# Altium PCB Layout_rectangular.pcbdoc
Units mm, origin at the board's own origin, x right, y up, seen from the top; angles counter-clockwise.
Board outline 101 x 79.7 mm, 2 copper layers (Top Layer, Bottom Layer); 20 components, 45 nets, 102 pads, 135 vias.
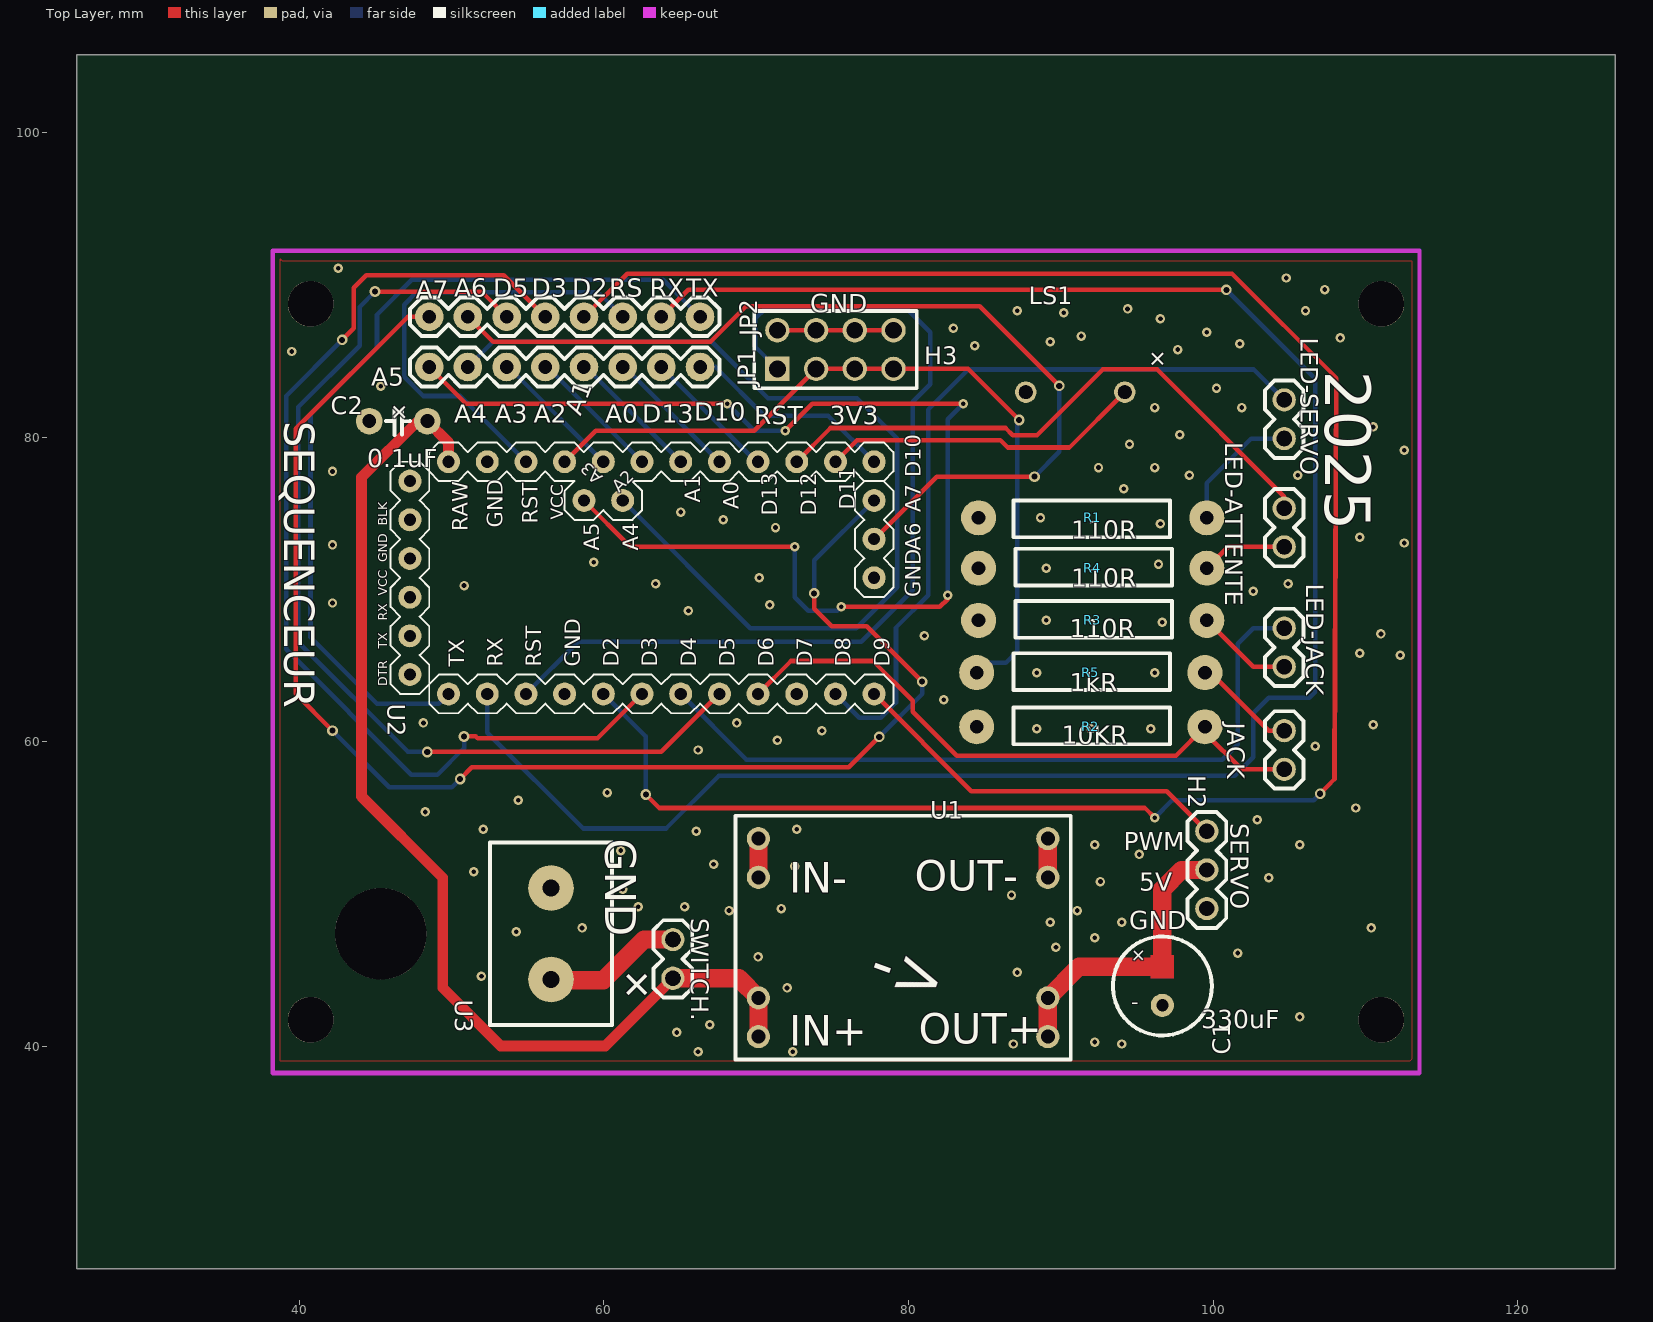
[diagram p0: Top Layer view]
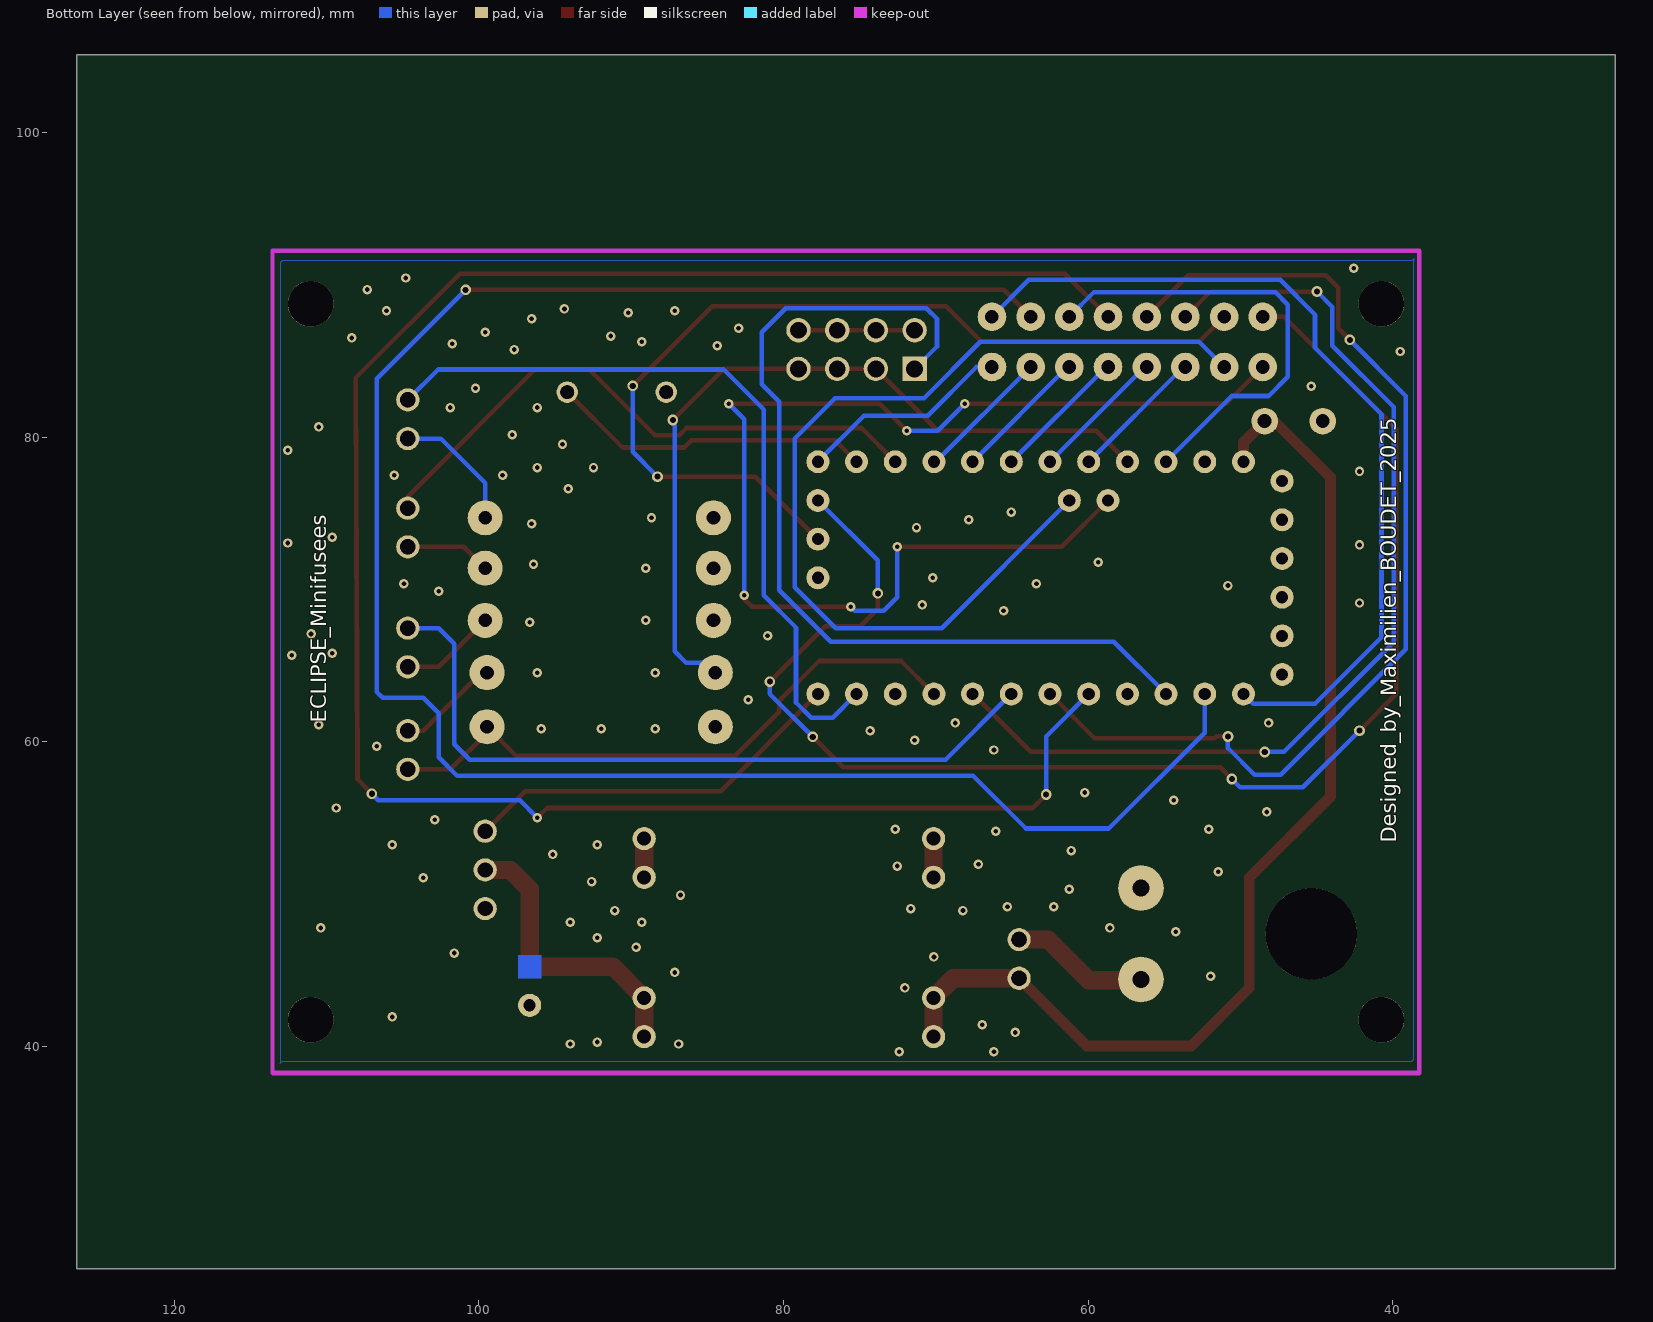
[diagram p1: Bottom Layer view, seen from below]

## Layer stack, top to bottom
Top Layer: signal copper (thickness not stored)
Dielectric: dielectric 0.32, FR-4, Dk 4.8
Bottom Layer: signal copper (thickness not stored)

## Board outline
126.4,25.4 25.4,25.4 25.4,105.1 126.4,105.1

## Components (designator, comment, footprint, x,y, rotation, side; value= is the part's Value field where it differs from the comment)
C1 "330uF" "CAPACITOR, 100UF 2.54MM PIN CAPACITOR" 96.67,43.965 r270 top
C2 "0.1uF" "CERAMIC CAPACITOR 150MIL" 44.6,81.049 r0 top
H2 "PINHEADER1x3RANGA" PINHEADER1X3 99.591,47.775 r270 top
H3 "IPCP254M08PB28V" HDR-TH_8P-P2.54-V-F-R2-C4-S2.54 75.207,85.748 r0 top
JACK "Branchement Jack" PINHEADER1X2 104.671,64.539 r90 top
JP1 "JUMPER-8-PINS" CONNECTOR-8-MALE-FEMALE 57.427,84.605 r0 top
JP2 "JUMPER-8-PINS" CONNECTOR-8-MALE-FEMALE 57.427,87.907 r0 top
LED-ATTENTE "LED1" PINHEADER1X2 104.671,68.984 r270 top
LED-JACK "LED2" PINHEADER1X2 104.671,61.11 r270 top
LED-SERVO "LED3" PINHEADER1X2 104.671,76.096 r270 top
LS1 "BUZZER-PTH_NO_SILK" BUZZER-12MM-NS 90.955,82.954 r0 top
R1 "110R" "1W RESISTANCE" 99.591,74.699 r180 top
R2 "10k" "1W RESISTANCE" 84.478,60.983 r0 top
R3 "110R" "1W RESISTANCE" 84.605,67.968 r0 top
R4 "110R" "1W RESISTANCE" 84.605,71.397 r0 top
R5 "1k" "1W RESISTANCE" 84.478,64.539 r0 top
SWITCH. "KCD1-101A" PINHEADER1X2 64.539,40.663 r270 top
U1 "MP1584EN_Mini_module_BUCK_4.5V-28V" MP1584EN_MINI_MODULE_BUCK_4.5V-28V 79.652,47.14 r0 top
U2 "Arduino Pro-Mini" ARDUINOPROMINI_ARDUINO_PRO_MINI 58.697,66.952 r90 top
U3 "PAD_CONN_BATT_9V" PAD_CONN_AWG19 56.538,47.394 r270 top

## Footprints (in the part's own frame and the unit in brackets; to place one, negate y for a bottom-side part, rotate by r counter-clockwise, add the part's x,y. Pads: shape width x height; smd on the part's side, far side on the other; paste and mask are expansions set on the pad)
"1W RESISTANCE" [mm]
  round 2.3 hole 0.9 paste+0 mask+0.051: 1(0,0) 2(14.986,0)
  silkscreen extent 2.41,-1.14 12.7,1.27
ARDUINOPROMINI_ARDUINO_PRO_MINI [mm]
  round 1.508 hole 0.8 paste+0 mask+0.102: A0(11.43,-8.89) A1(11.43,-6.35) A2(11.43,-3.81) A3(11.43,-1.27) A4(8.89,-2.54) A5(8.89,0) A6(6.35,-19.05) A7(8.89,-19.05) BLK(10.16,11.43) D2(-3.81,-1.27) D3(-3.81,-3.81) D4(-3.81,-6.35) D5(-3.81,-8.89) D6(-3.81,-11.43) D7(-3.81,-13.97) D8(-3.81,-16.51) D9(-3.81,-19.05) D10(11.43,-19.05) D11(11.43,-16.51) D12(11.43,-13.97) D13(11.43,-11.43) DTR(-2.54,11.43) GND(-3.81,1.27) GND@1(11.43,6.35) GND@2(7.62,11.43) GND@3(3.81,-19.05) RAW(11.43,8.89) RST(11.43,3.81) RST@1(-3.81,3.81) RX(-3.81,6.35) RX@1(2.54,11.43) TX(-3.81,8.89) TX@1(0,11.43) VCC(11.43,1.27) VCC@1(5.08,11.43)
  silkscreen extent -5.08,-20.32 12.7,12.7
BUZZER-12MM-NS [mm]
  round 1.408 hole 0.9 slot 0.9 at 0 deg paste+0 mask+0.051: +(3.25,0) -(-3.25,0)
"CAPACITOR, 100UF 2.54MM PIN CAPACITOR" [mm]
  round 1.52 hole 0.8 paste+0 mask+0.051: 2(1.27,0)
  Top Layer region: -2.03,0.76 -0.51,0.76 -0.51,-0.76 -2.03,-0.76
  Bottom Layer region: -2.03,0.76 -0.51,0.76 -0.51,-0.76 -2.03,-0.76
  Multi-Layer region: -2.03,0.76 -0.51,0.76 -0.51,-0.76 -2.03,-0.76
  silkscreen extent -3.25,-3.25 3.25,3.25
"CERAMIC CAPACITOR 150MIL" [mm]
  round 1.75 hole 0.914 paste+0 mask+0.102: 1(0,0) 2(3.81,0)
  silkscreen extent 1.11,-0.91 2.67,0.78
CONNECTOR-8-MALE-FEMALE [mil]
  round 74 hole 35 paste+0 mask+4: 1(-350,0) 2(-250,0) 3(-150,0) 4(-50,0) 5(50,0) 6(150,0) 7(250,0) 8(350,0)
  silkscreen extent -400,-50 400,50
HDR-TH_8P-P2.54-V-F-R2-C4-S2.54 [mm]
  rect 1.6x1.6 hole 1.1 paste+0 mask+0.051: 1(-3.81,-1.27)
  round 1.6 hole 1.1 paste+0 mask+0.051: 2(-3.81,1.27) 3(-1.27,-1.27) 4(-1.27,1.27) 5(1.27,-1.27) 6(1.27,1.27) 7(3.81,-1.27) 8(3.81,1.27)
  silkscreen extent -5.33,-2.54 5.33,2.54
MP1584EN_MINI_MODULE_BUCK_4.5V-28V [mil]
  round 60 hole 36 paste+0 mask+2: 1(-374.01,255.9) 2(-374.01,155.9) 3(-374.01,-155.9) 4(-374.01,-255.9) 5(374.02,255.9) 6(374.02,155.9) 7(374.02,-155.9) 8(374.02,-255.9)
  silkscreen extent -433,-315 433,315
PAD_CONN_AWG19 [mm]
  round 3 hole 1.1 paste+0 mask+0.051: 1(-3,0) 2(3,0)
  silkscreen extent -6,-4 6,4
PINHEADER1X2 [mil]
  round 60 hole 39.37 slot 39.57 at 0 deg paste+0 mask+2: 1(-250,0) 2(-150,0)
  silkscreen extent -300,-50 -100,50
PINHEADER1X3 [mil]
  round 60 hole 39.37 paste+0 mask+2: 1(-250,0) 2(-150,0) 3(-50,0)
  silkscreen extent -300,-50 0,50

## Free pads (board coordinates)
  round 3 hole 3 unplated paste+0: ""(40.75,41.75) ""(40.75,88.75) ""(111.05,41.75) ""(111.05,88.75)
  round 6 hole 6 unplated paste+0: ""(45.362,47.394)

## Via types
v1: diameter 0.62, hole 0.31, Top Layer to Bottom Layer, tented both sides, 120 vias
v2: diameter 0.7, hole 0.4, Top Layer to Bottom Layer, tented both sides, 15 vias

## Nets (pads, with @x,y where several pads share a name; then routed paths per layer and width w, separated by ;. In a path a pad name is that pad's centre, name@x,y a point inside that pad or via, vN(x,y) a via of type N, cw(c..) or ccw(c..) an arc to the next point about the centre after c; other vN are vias at no path point)
3V3: H3.3 H3.5 H3.7 R5.1 U2.VCC | length 53
  Top Layer w0.3: U2.VCC 59.459,80.414 69.873,80.414 H3.3 H3.5 H3.7 83.91,84.478 v2(87.264,81.124)
  Bottom Layer w0.3: R5.1@84.986,65.047 R5.1 85.113,65.174 86.383,65.174 87.145,65.936 87.145,81.123 v2@87.264,81.123
9V: C2.2 SWITCH..2 U1.3 U1.4 U2.RAW | length 72
  Top Layer w0.7: U2.RAW 49.807,79.652 C2.2 47.775,81.049 44.092,77.366 44.092,56.411 49.423,51.08 49.423,43.841 53.236,40.028 60.094,40.028 SWITCH..2
  Top Layer w1.2: SWITCH..2 68.859,44.473 U1.3 U1.4
C1_1: H2.2 U1.7 U1.8 | length 19.4
  Top Layer w1.2: U1.7 91.206,45.235 96.67,45.235 96.67,50.315 97.94,51.585 H2.2 ; U1.8 U1.7
GND: C1.2 C2.1 H2.3 H3.2 H3.4 H3.6 H3.8 LS1.- R1.2 R2.1 R3.1 R4.1 U1.1 U1.2 U1.5 U1.6 U2.GND U2.GND@1 U2.GND@3 U3.1 | length 12.7
  Top Layer w0.3: H3.2 H3.4 H3.6 H3.8
  Top Layer w1.2: U1.2 U1.1 ; U1.6 U1.5
  other v1: 66.19,39.647 72.413,39.647 86.891,40.155 94.003,40.155 92.225,40.282 64.793,40.917 66.952,41.425 105.687,41.933 72.032,43.838 51.966,44.6 87.145,44.854 70.127,45.87 101.623,46.124 89.685,46.505 92.225,47.14 54.252,47.521 58.57,47.775 110.386,47.775 89.304,48.156 94.003,48.156 68.222,48.918 91.082,48.918 71.651,49.045 62.253,49.172 65.301,49.172 86.764,49.934 61.237,50.315 92.606,50.823 103.655,51.077 51.458,51.458 72.54,51.839 67.206,51.966 95.146,52.601 61.11,52.855 92.225,53.236 105.687,53.236 66.063,54.125 52.093,54.252 72.667,54.252 102.893,54.887 48.283,55.395 109.37,55.649 54.379,56.157 60.221,56.665 66.19,59.459 106.703,59.713 71.397,60.094 74.318,60.729 88.415,60.856 91.971,60.856 95.908,60.856 110.513,61.11 48.156,61.237 68.73,61.237 82.319,62.761 88.415,64.539 96.162,64.539 112.291,65.682 109.624,65.809 81.049,66.952 111.021,67.079 96.67,67.841 89.05,67.968 65.555,68.603 70.889,68.984 42.187,69.111 102.639,69.873 50.823,70.254 63.396,70.381 104.925,70.381 70.208,70.762 89.05,71.397 96.416,71.651 59.332,71.778 42.187,72.921 112.545,73.048 109.624,73.429 71.27,74.064 96.543,74.318 67.841,74.572 88.669,74.699 65.047,75.08 94.13,76.604 98.448,77.493 105.56,77.493 42.187,77.747 92.479,78.001 96.162,78.001 112.545,79.144 94.511,79.525 97.813,80.16 110.513,80.668 96.162,81.938 101.877,81.938 100.226,83.208 45.362,83.335 39.52,85.621 97.686,85.748 84.351,86.002 101.75,86.129 89.304,86.256 108.354,86.51 91.336,86.637 99.591,86.891 82.954,87.145 96.543,87.78 90.193,88.161 87.145,88.288 106.068,88.288 94.384,88.415 107.338,89.685 104.798,90.447 42.568,91.082
INTERRUPTEUR_1: SWITCH..1 U3.2 | length 9.1
  Top Layer w1.2: U3.2@56.538,44.346 59.967,44.346 62.634,47.013 SWITCH..1
JACK_2: JACK.2 R5.2 | length 7.3
  Top Layer w0.3: R5.2 R5.2@100.353,64.539 ; R5.2@99.845,64.539 103.655,60.729 JACK.2
LED-ATTENTE_1: LED-ATTENTE.1 U2.D12 | length 39.1
  Top Layer w0.3: U2.D12 74.884,80.599 86.373,80.599 86.85,80.122 88.44,80.122 92.758,84.442 96.325,84.442 104.671,76.096 LED-ATTENTE.1
LED-JACK_1: LED-JACK.1 U2.D4 | length 48.9
  Bottom Layer w0.3: U2.D4 69.365,58.824 100.607,58.824 101.623,59.84 101.623,66.444 102.639,67.46 LED-JACK.1
LED-SERVO_1: LED-SERVO.1 U2.D8 | length 50.4
  Bottom Layer w0.3: U2.D8 76.769,61.58 78.191,61.58 79.182,62.573 79.182,67.498 81.303,69.619 81.303,81.811 83.929,84.437 102.68,84.437 LED-SERVO.1
LS1_+: LS1.+ U2.D11 | length 21.3
  Top Layer w0.3: U2.D11 76.623,79.798 86.04,79.798 86.517,79.32 90.571,79.32 LS1.+
R1_1: LED-SERVO.2 R1.1 | length 9
  Bottom Layer w0.3: R1.1@99.718,75.08 99.591,74.953 R1.1 99.591,76.985 102.512,79.906 LED-SERVO.2
R2_2: JACK.1 R2.2 U2.D6 | length 40.6
  Top Layer w0.3: U2.D6 72.286,65.301 77.67,65.301 80.272,62.699 80.272,61.973 83.161,59.084 97.565,59.084 R2.2 99.464,60.602 101.877,58.189 JACK.1
R3_2: LED-JACK.2 R3.2 | length 6.3
  Top Layer w0.3: R3.2 102.639,64.92 LED-JACK.2
R4_2: LED-ATTENTE.2 R4.2 | length 5.7
  Top Layer w0.3: R4.2 100.988,72.794 LED-ATTENTE.2
S$150: 
S$152: 
S$236: 
S$240: 
S$92912: 
S$92916: 
S$92920: 
U2_A0: JP1.6 U2.A0 | length 8.9
  Bottom Layer w0.3: JP1.6 61.364,84.605 U2.A0
U2_A1: JP1.5 U2.A1 | length 8.9
  Bottom Layer w0.3: JP1.5 58.824,84.605 U2.A1
U2_A2: JP1.4 U2.A2 | length 8.9
  Bottom Layer w0.3: JP1.4 56.284,84.605 U2.A2
U2_A3: JP1.3 U2.A3 | length 8.9
  Bottom Layer w0.3: JP1.3 53.744,84.605 U2.A3
U2_A4: JP1.2 U2.A4 | length 63.9
  Bottom Layer w0.3: JP1.2 52.728,86.256 67.079,86.256 70.78,82.555 76.622,82.555 79.271,79.906 79.271,70.147 76.584,67.46 69.619,67.46 U2.A4
U2_A5: JP1.1 U2.A5 | length 79.9
  Top Layer w0.3: JP1.1 50.95,82.192 v1(68.095,82.192) ; U2.A5 61.745,72.794 v1(72.54,72.794) ; v1(71.905,80.414) 73.683,82.192 v1(83.589,82.192) ; v1(75.588,68.857) 82.065,68.857 82.573,69.365 v1(82.573,69.619)
  Bottom Layer w0.3: v1(68.095,82.192) 69.873,80.414 v1(71.905,80.414) ; v1(72.54,72.794) 72.54,69.873 72.54,69.492 73.429,68.603 75.334,68.603 v1(75.588,68.857) ; v1(82.573,69.619) 82.573,81.176 v1(83.589,82.192)
U2_A6: JP2.2 U2.A6 | length 61.5
  Top Layer w0.3: JP2.2 52.728,86.256 67.002,86.256 69.334,88.588 84.682,88.588 v2(89.903,83.367) ; U2.A6 81.851,77.406 v2(88.274,77.406)
  Bottom Layer w0.3: v2(88.274,77.406) 89.903,79.035 v2(89.903,83.367)
U2_A7: JP2.1 U2.A7 | length 94
  Top Layer w0.3: v2(42.187,60.729) 39.774,63.142 39.774,80.541 47.14,87.907 JP2.1 ; v2(50.569,57.554) 51.331,58.316 76.078,58.316 v2(78.084,60.322) ; v2(73.81,69.746) 73.81,68.73 74.953,67.587 77.257,67.587 v2(80.901,63.943)
  Bottom Layer w0.3: v2(42.187,60.729) 45.901,57.015 50.03,57.015 v2(50.569,57.554) ; v2(73.81,69.746) 73.81,71.905 U2.A7 ; v2(78.084,60.322) 80.901,63.139 v2(80.901,63.943)
U2_BLK: U2.BLK
U2_D2: JP2.5 U2.D2 | length 134.4
  Top Layer w0.3: JP2.5 61.527,90.737 101.242,90.737 108.1,83.879 107.973,57.554 v2(107.03,56.585) ; v2(62.761,56.538) 63.65,55.649 95.527,55.649 v1(96.162,55.014)
  Bottom Layer w0.3: U2.D2 62.761,60.348 v2(62.761,56.538) ; v1(96.162,55.014) 97.305,56.157 106.601,56.157 v2(107.03,56.585)
U2_D3: JP2.4 U2.D3 | length 69.1
  Top Layer w0.3: v2(42.822,86.383) 43.584,87.145 43.584,89.812 44.402,90.63 53.434,90.63 JP2.4 ; v2(50.823,60.348) 51.585,60.348 51.712,60.221 59.586,60.221 U2.D3
  Bottom Layer w0.3: v2(42.822,86.383) 39.139,82.7 39.139,66.068 47.366,57.841 49.078,57.841 50.823,59.586 v2(50.823,60.348)
U2_D5: JP2.3 U2.D5 | length 66.6
  Top Layer w0.3: v2(44.981,89.558) 51.966,89.558 JP2.3 ; v2(48.41,59.332) 63.777,59.332 U2.D5
  Bottom Layer w0.3: v2(44.981,89.558) 43.965,88.542 43.965,86.002 39.942,81.979 39.942,66.53 47.14,59.332 v2(48.41,59.332)
U2_D9: H2.1 U2.D9 | length 25.6
  Top Layer w0.3: U2.D9 84.134,56.755 96.961,56.755 H2.1
U2_D10: JP1.8 U2.D10 | length 14
  Bottom Layer w0.3: JP1.8 67.333,84.605 70.531,81.407 74.722,81.407 U2.D10
U2_D13: JP1.7 U2.D13 | length 8.9
  Bottom Layer w0.3: JP1.7 70,78.382 U2.D13
U2_DTR: U2.DTR
U2_GND@2: U2.GND@2
U2_RST: JP2.6 U2.RST | length 30.4
  Bottom Layer w0.3: U2.RST 50.569,82.7 48.156,82.7 46.899,83.957 46.899,88.697 47.727,89.525 59.619,89.525 JP2.6
U2_RST@1: H3.1 U2.RST@1 | length 62
  Bottom Layer w0.3: 54.887,63.142 58.316,66.571 76.911,66.571 80.287,69.947 80.287,82.319 81.43,83.462 81.43,86.891 79.85,88.471 70.625,88.471 69.924,87.77 69.924,85.951 H3.1
U2_RX: JP2.7 U2.RX | length 131.6
  Top Layer w0.3: JP2.7 65.54,89.67 v2(100.869,89.67)
  Bottom Layer w0.3: U2.RX 52.347,60.602 58.646,54.303 64.082,54.303 67.534,57.755 101.42,57.755 102.639,58.974 102.639,61.872 103.655,62.888 106.322,62.888 106.703,63.269 106.703,83.835 v2(100.869,89.67)
U2_RX@1: U2.RX@1
U2_TX: JP2.8 U2.TX | length 57.3
  Bottom Layer w0.3: U2.TX 49.172,62.507 45.108,62.507 40.744,66.871 40.744,81.511 45.108,85.875 45.108,88.042 47.394,90.328 63.896,90.328 JP2.8
U2_TX@1: U2.TX@1
U2_VCC@1: U2.VCC@1
pads on no net: U2.D7

## Polygon pours and split planes (outlines as drawn)
GND on Bottom Layer (solid): 38.631,91.717 38.758,91.59 112.926,91.59 113.053,91.463 113.053,38.885 112.926,39.012 38.758,39.012 38.631,39.139 38.631,91.717 38.631,91.59
GND on Top Layer (solid): 38.758,91.717 38.885,91.59 113.053,91.59 113.053,39.139 112.926,39.012 38.758,39.012 38.758,91.717 38.758,91.59

## Silkscreen, mask and mechanical layers (free items; w line width, h text height)
Top Overlay:
  text "A6" at 50.188,89.212 h1.2
  text "D5" at 52.728,89.212 h1.2
  text "D3" at 55.268,89.212 h1.2
  text "D2" at 57.935,89.212 h1.2
  text "RS" at 60.348,89.212 h1.2
  text "RX" at 63.015,89.212 h1.2
  text "TX" at 65.428,89.212 h1.2
  text "A7" at 47.648,89.085 h1.2
  text "GND" at 73.556,88.196 h1.2
  text "+" at 97.221,85.029 h1.2 r135
  text "2025" at 107.362,84.351 h3 r270
  text "A5" at 44.727,83.37 h1.2
  text "+" at 46.716,82.489 h1.2 r225
  text "A1" at 58.495,81.342 h1.2 r69
  text "D10" at 65.936,81.084 h1.2
  text "SEQUENCEUR" at 39.028,81.049 h2 r270
  text "A4" at 50.188,80.957 h1.2
  text "A3" at 52.855,80.957 h1.2
  text "A2" at 55.395,80.957 h1.2
  text "A0" at 60.094,80.957 h1.2
  text "D13" at 62.507,80.957 h1.2
  text "RST" at 69.873,80.83 h1.2
  text "3V3" at 74.826,80.83 h1.2
  text "0.1uF" at 44.473,78.036 h1.2
  text "110R" at 90.701,73.337 h1.2
  text "110R" at 90.701,70.162 h1.2
  text "110R" at 90.574,66.86 h1.2
  text "1kR" at 90.574,63.304 h1.2
  text "10KR" at 90.066,59.875 h1.2
  text "SERVO" at 101.15,54.633 h1.2 r270
  text "PWM" at 94.13,52.89 h1.2
  text "5V" at 95.146,50.223 h1.2
  text "GND" at 94.511,47.683 h1.2
  text "330uF" at 99.21,41.206 h1.2
Bottom Overlay:
  text "ECLIPSE_Minifusees" at 110.013,61.237 h1 r270
  text "Designed_by_Maximilien_BOUDET_2025" at 39.782,53.363 h1 r270

## Text inside footprints (layer, text, board x,y; h text height)
C1: Top Overlay "-" at 94.638,42.449 h1; Top Overlay "+" at 94.992,45.262 h1 r45
LS1: Document "+" at 94.251,85.615 h1.78 r135
U1: Top Overlay "->" at 77.234,44.333 h3 r340; Top Overlay "IN-" at 72.159,50.077 h2; Top Overlay "IN+" at 72.159,40.044 h2; Top Overlay "OUT-" at 80.414,50.204 h2; Top Overlay "OUT+" at 80.668,40.171 h2
U2: Top Overlay "RST" at 55.903,64.92 h1.02 r90; Top Overlay "GND" at 58.443,64.92 h1.02 r90; Top Overlay "D2" at 60.983,64.92 h1.02 r90; Top Overlay "RX" at 53.363,64.92 h1.02 r90; Top Overlay "TX" at 50.823,64.92 h1.02 r90; Top Overlay "DTR   TX   RX  VCC  GND  BLK" at 45.794,63.65 h0.61 r90; Top Overlay "D4" at 66.063,64.92 h1.02 r90; Top Overlay "D5" at 68.603,64.92 h1.02 r90; Top Overlay "D6" at 71.143,64.92 h1.02 r90; Top Overlay "D7" at 73.683,64.92 h1.02 r90; Top Overlay "D8" at 76.223,64.92 h1.02 r90; Top Overlay "D9" at 78.763,64.92 h1.02 r90; Top Overlay "D10" at 80.795,77.366 h1.02 r90; Top Overlay "D11" at 76.477,75.243 h1.02 r90; Top Overlay "D12" at 73.937,74.826 h1.02 r90; Top Overlay "D13" at 71.397,74.826 h1.02 r90; Top Overlay "A0" at 68.857,75.27 h1.02 r90; Top Overlay "A1" at 66.317,75.685 h1.02 r90; Top Overlay "A2" at 61.016,76.317 h0.81 r45; Top Overlay "A3" at 60,77.399 h0.81 r135; Top Overlay "VCC" at 57.325,74.572 h0.81 r90; Top Overlay "RST" at 55.649,74.318 h1.02 r90; Top Overlay "GND" at 53.363,74.064 h1.02 r90; Top Overlay "RAW" at 51.077,73.81 h1.02 r90; Top Overlay "D3" at 63.523,64.92 h1.02 r90; Top Overlay "A6" at 80.795,72.54 h1.02 r90; Top Overlay "A7" at 80.795,75.08 h1.02 r90; Top Overlay "A5" at 59.713,72.54 h1.02 r90; Top Overlay "A4" at 62.253,72.54 h1.02 r90; Top Overlay "GND" at 80.795,69.492 h1.02 r90
U3: Top Overlay "+" at 61.955,42.612 h2.03 r45; Top Overlay "GND" at 60.094,53.617 h2.03 r270